# EAGLE board ASPIRATION-A (EAGLE 7.1.0)
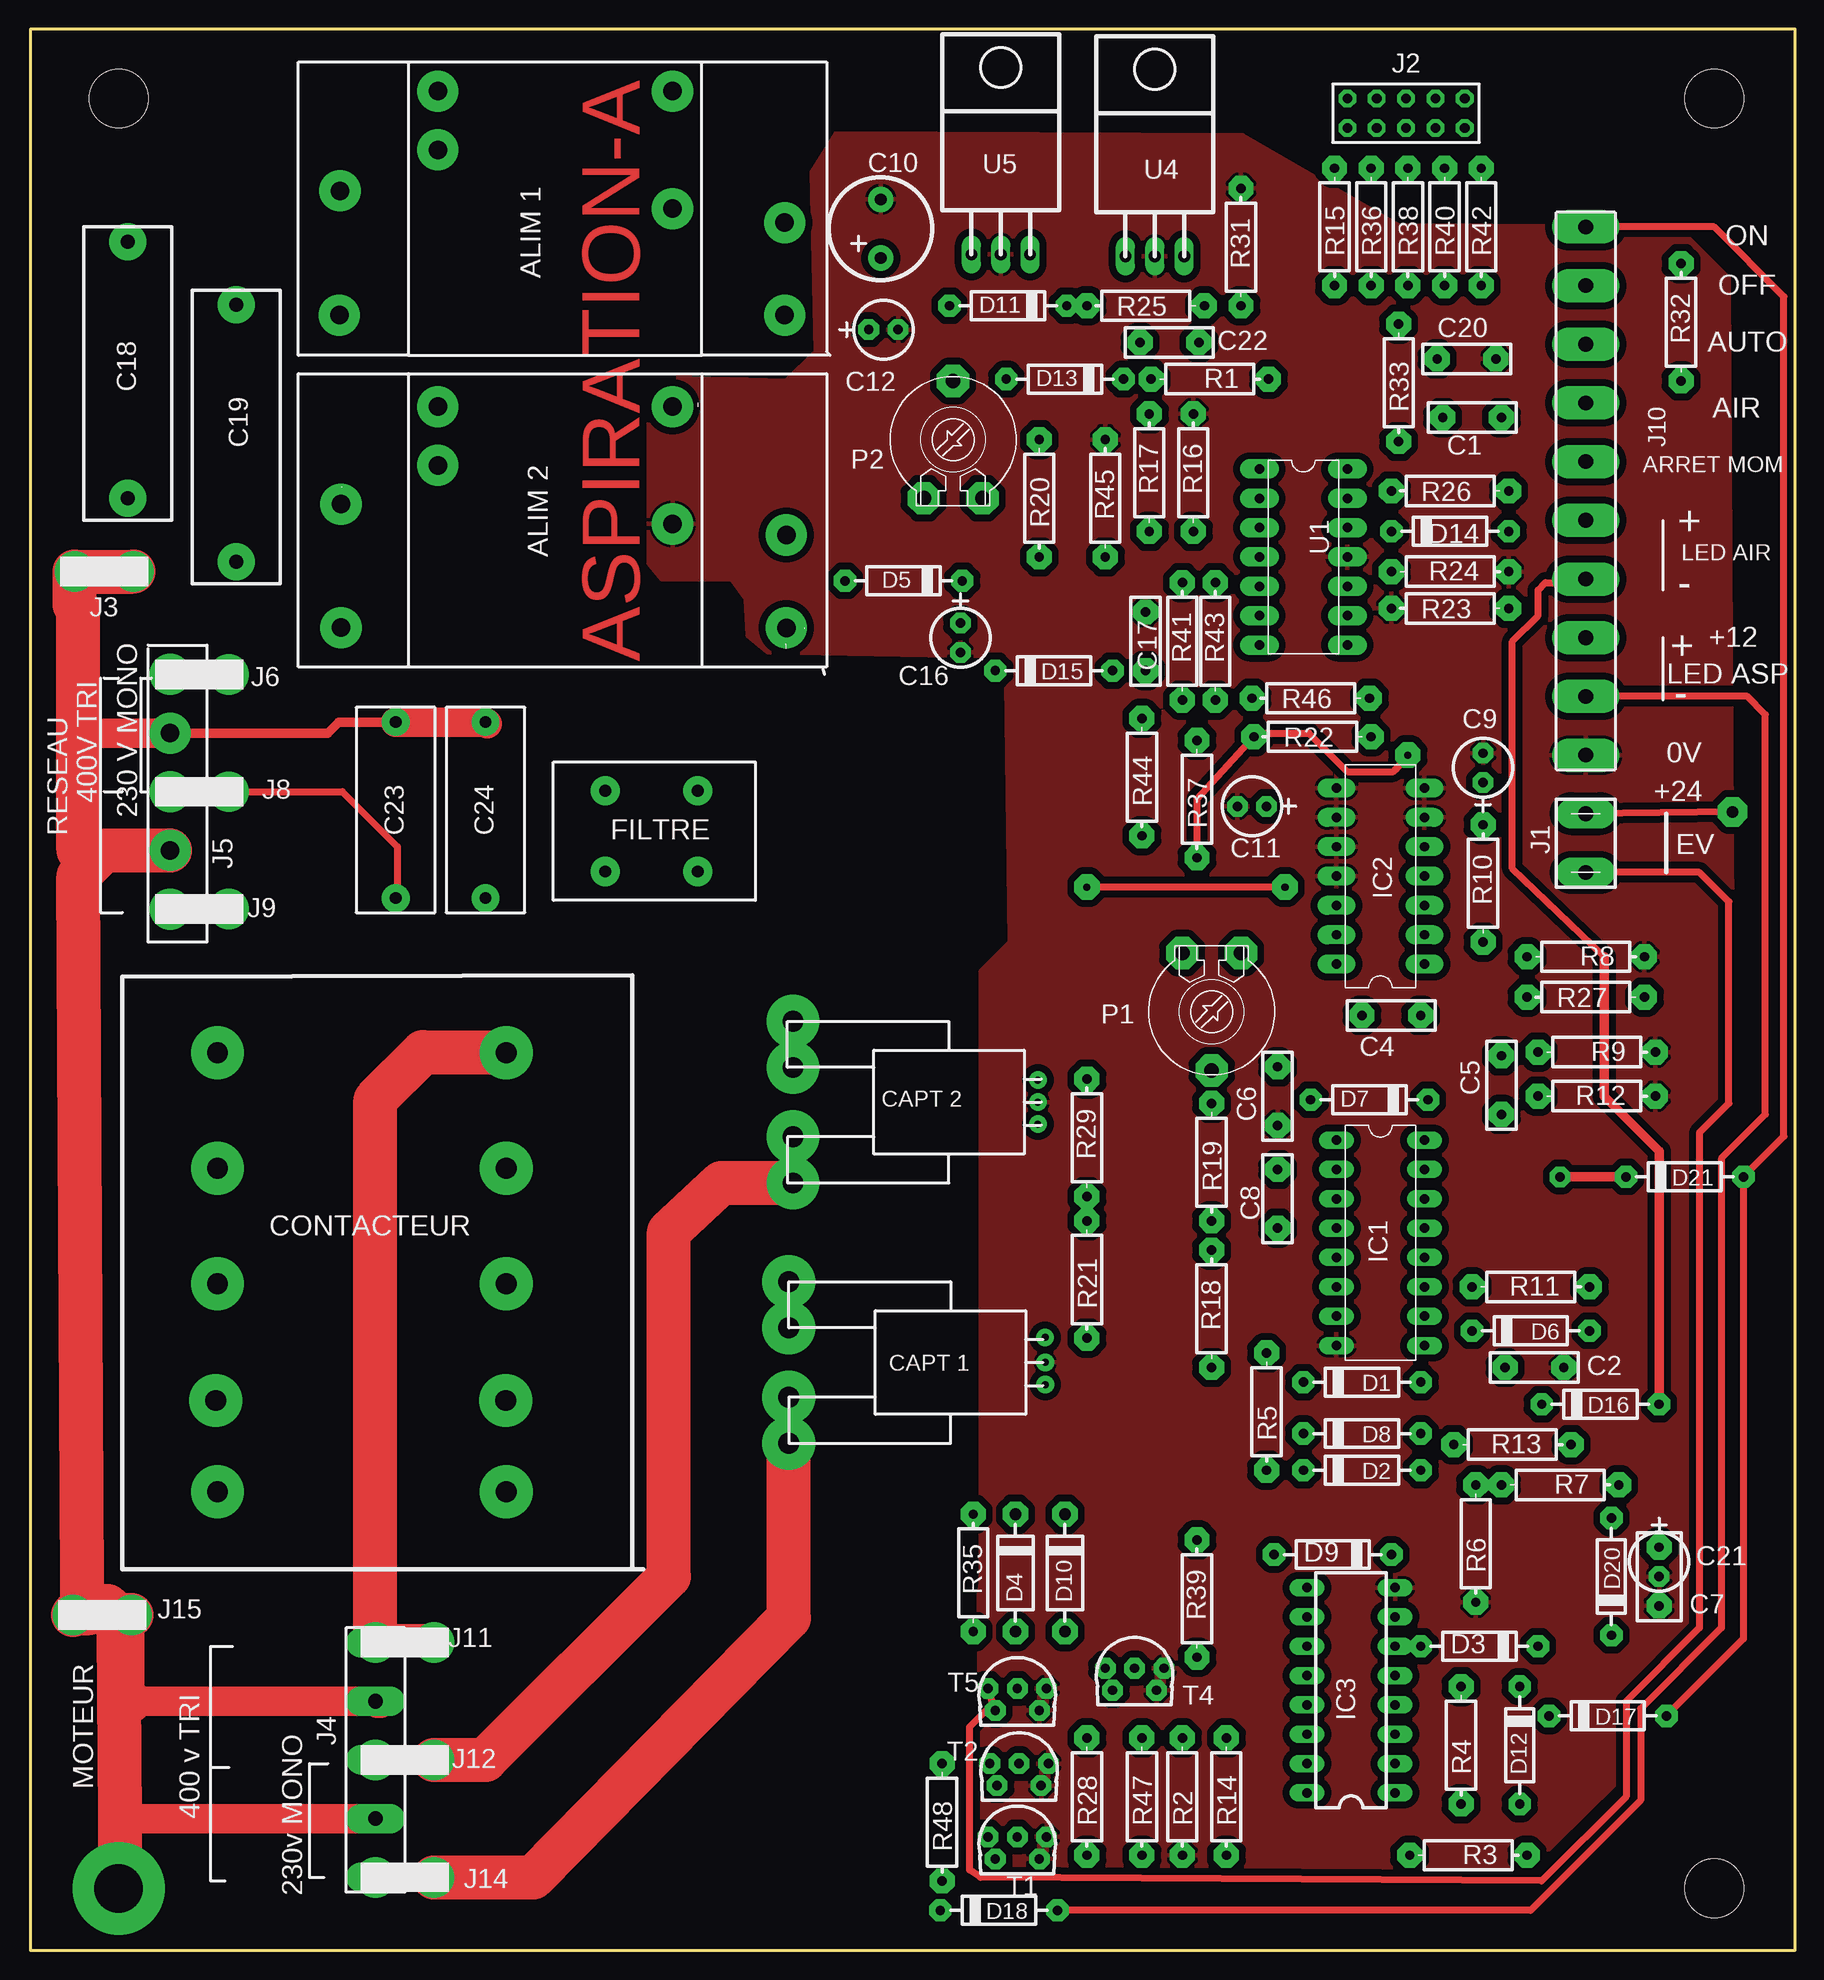
[diagram p0: board, top side]
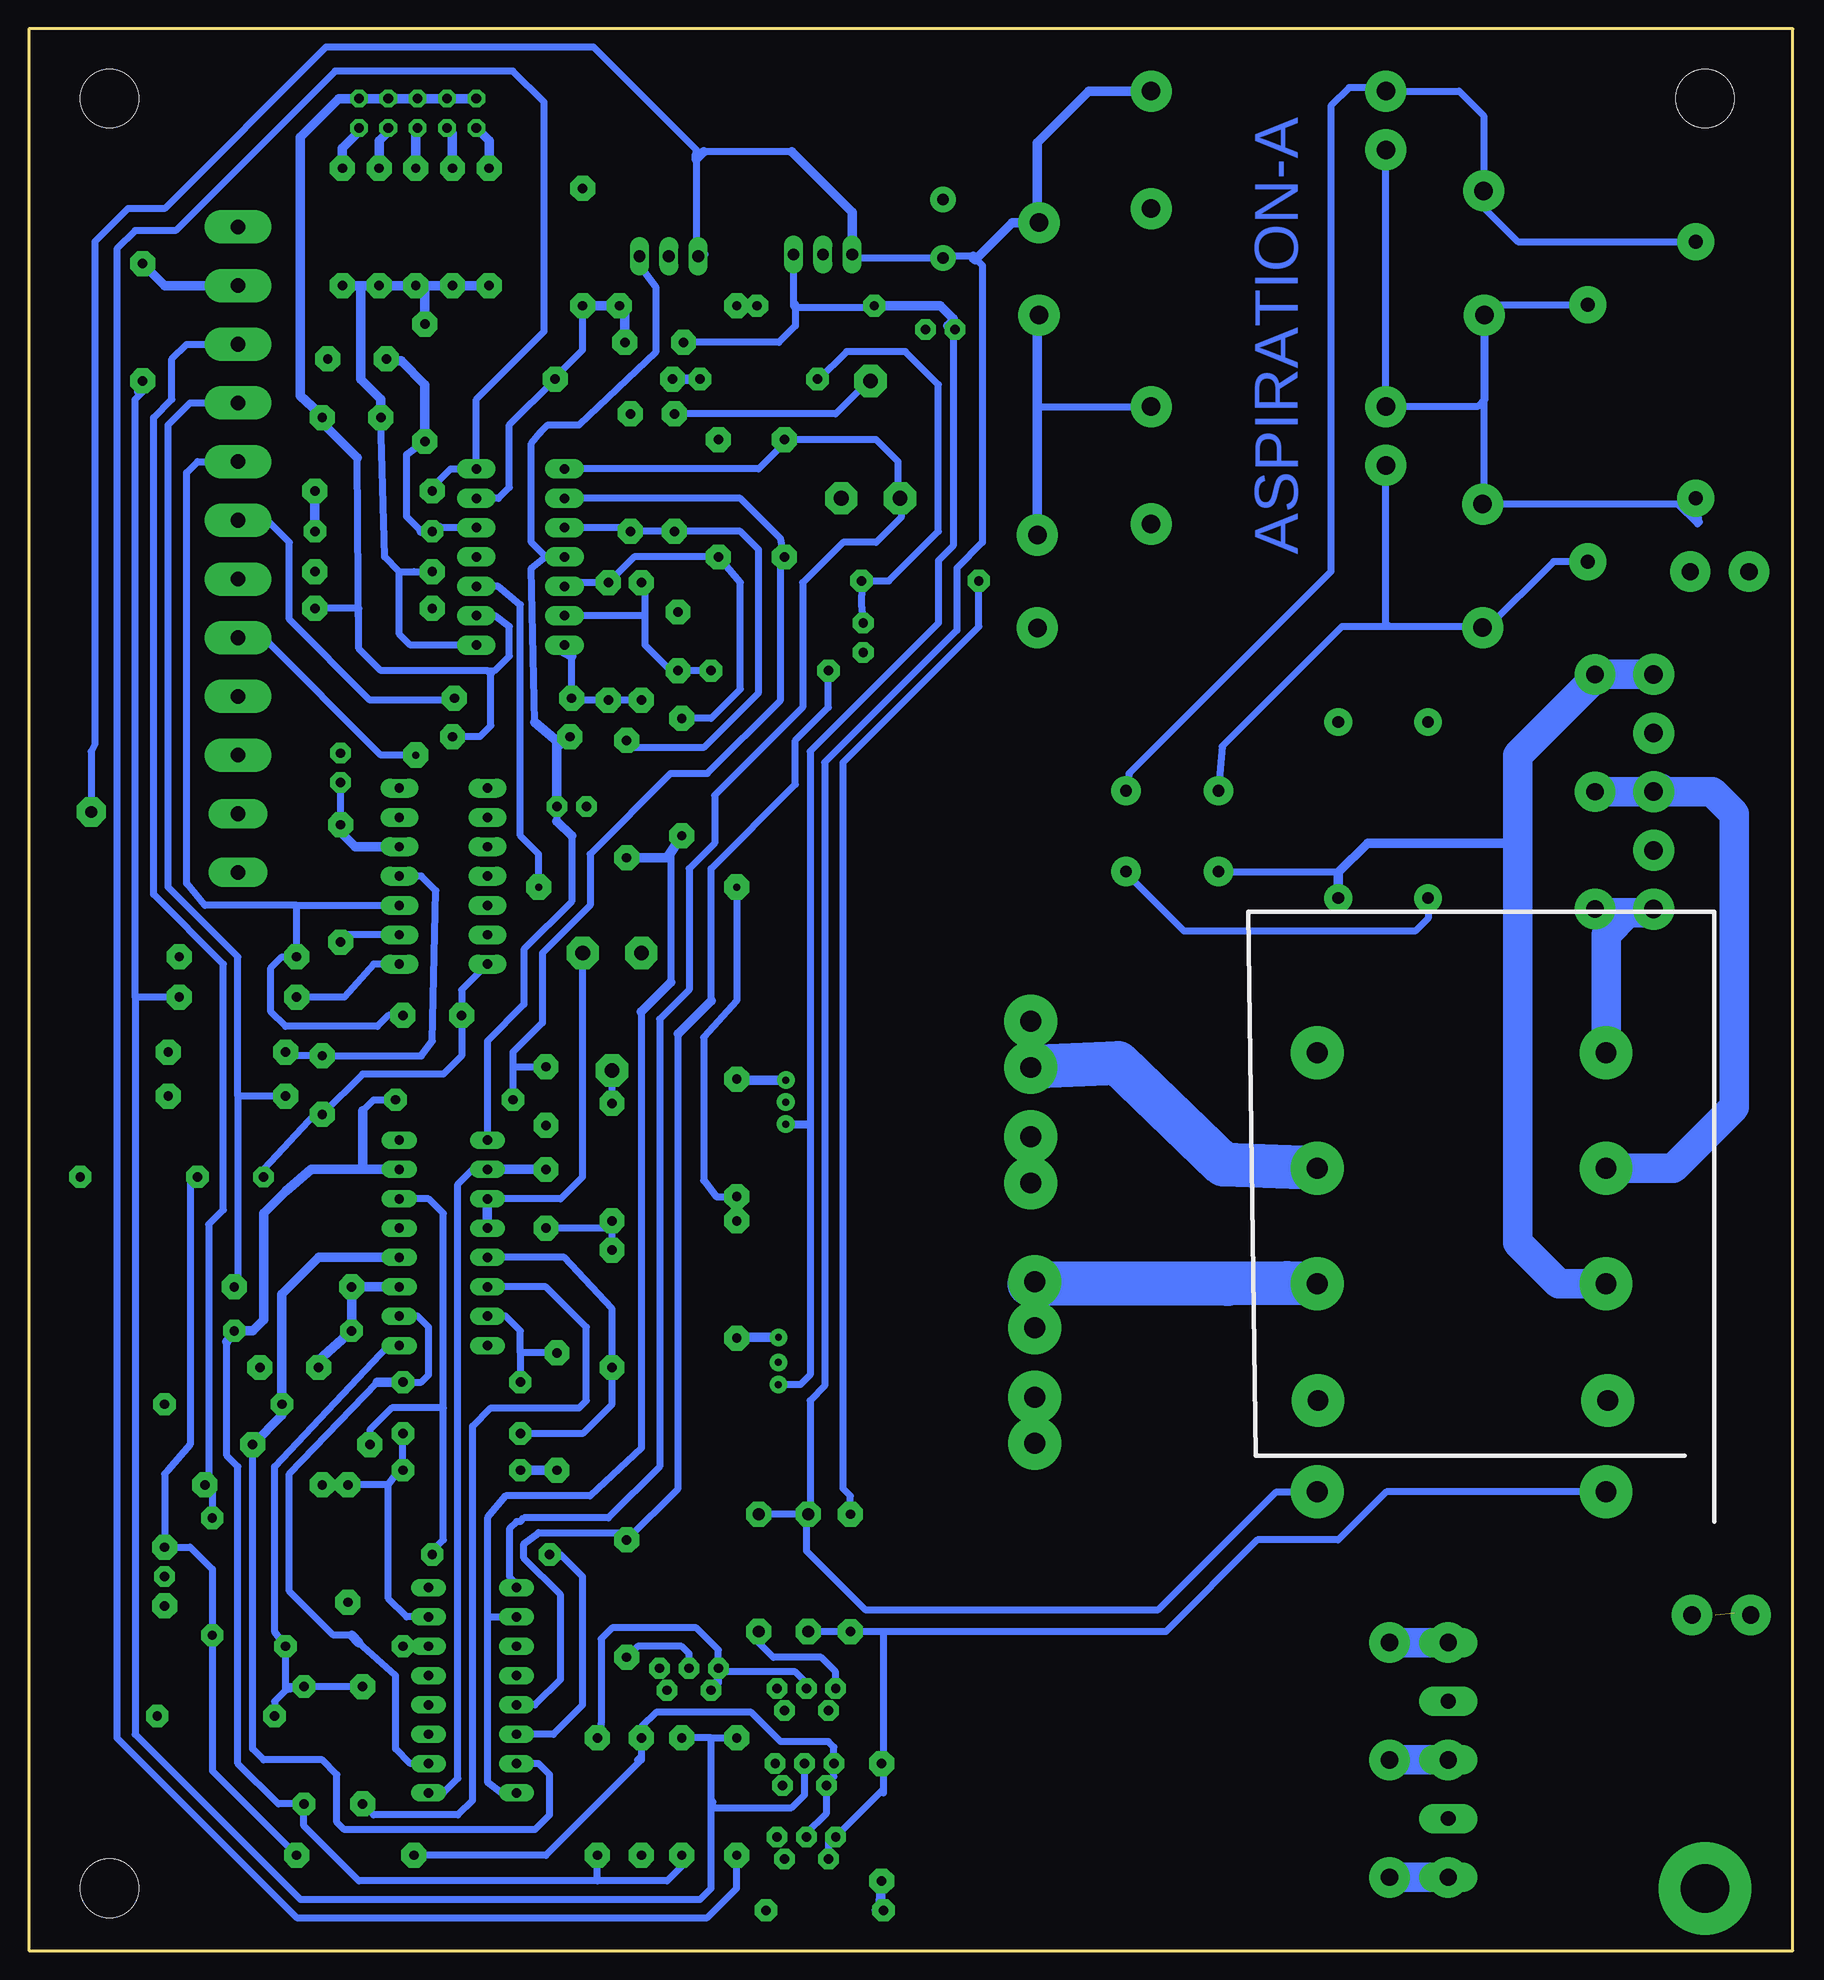
[diagram p1: board, bottom side, seen from below]

Size 152.72 x 166.37 mm. Coordinates in mm from the lower left corner, seen from the top.
Outline: 152.72,166.37 152.72,0 0,0 0,166.37 152.72,166.37
Copper layers (1*16): Top 0.035mm / dielectric 1.5mm / Bottom 0.035mm
Design rules "default": minimum track width 10mil, minimum drill 24mil, track to track 8mil, track to pad 8mil, pad to pad 8mil, via to via 8mil, smd to smd 8mil, copper to edge 40mil, drill to drill 8mil, minimum pad ring 10mil, minimum via ring 8mil, stop-mask expansion 0mil, vias tented up to drill 0mil, thermal gap 10mil
Holes 5.08 mm at 7.62,160.34 145.73,160.34 145.73,5.4

## Footprints (pad centres in the part's own frame; a part is rotated, then mirrored left to right if it is on the bottom)
C-5 = drill 0.813 pad 2.159 octagon: 1 5.08,0; 2 0,0
C-5L = drill 0.813 pad 2.159 octagon: 1 5.08,0; 2 0,0
02P000RA = drill 0.813 pad 1.778 octagon: N 2.54,0; P 0,0
02P010RA = drill 1.016 pad 2.184: N 5.08,0; P 0,0
C-22 = drill 1.2 pad 3.2: 1 2.54,0; 2 24.765,0
C-15 = drill 1.016 pad 2.413: 1 0,0; 2 15.24,0
D-10 = drill 0.813 pad 1.93 octagon: A -5.08,0; K 5.08,0
D-10_1MM = drill 1.016 pad 2.184 octagon: A -5.08,0; K 5.08,0
DIL-16 = drill 0.813 pad 1.524 long: 1 -8.89,-3.81; 2 -6.35,-3.81; 3 -3.81,-3.81; 4 -1.27,-3.81; 5 1.27,-3.81; 6 3.81,-3.81; 7 6.35,-3.81; 8 8.89,-3.81; 9 8.89,3.81; 10 6.35,3.81; 11 3.81,3.81; 12 1.27,3.81; 13 -1.27,3.81; 14 -3.81,3.81; 15 -6.35,3.81; 16 -8.89,3.81
DIL-14 = drill 0.813 pad 1.651 long: 1 -7.62,-3.81; 2 -5.08,-3.81; 3 -2.54,-3.81; 4 0,-3.81; 5 2.54,-3.81; 6 5.08,-3.81; 7 7.62,-3.81; 8 7.62,3.81; 9 5.08,3.81; 10 2.54,3.81; 11 0,3.81; 12 -2.54,3.81; 13 -5.08,3.81; 14 -7.62,3.81
DIL-16' = drill 0.813 pad 1.397 octagon: 1 -8.89,-3.81; 2 -6.35,-3.81; 3 -3.81,-3.81; 4 -1.27,-3.81; 5 1.27,-3.81; 6 3.81,-3.81; 7 6.35,-3.81; 8 8.89,-3.81; 9 8.89,3.81; 10 6.35,3.81; 11 3.81,3.81; 12 1.27,3.81; 13 -1.27,3.81; 14 -3.81,3.81; 15 -6.35,3.81; 16 -8.89,3.81
2X1_508 = drill 1.27 pad 2.54 long: 1 -1.27,0; 2 3.81,0
CON05X2 = drill 0.838 pad 1.524 octagon: 1 0,0; 2 0,2.54; 3 2.54,0; 4 2.54,2.54; 5 5.08,0; 6 5.08,2.54; 7 7.62,0; 8 7.62,2.54; 9 10.16,0; 10 10.16,2.54
2_TROUS = drill 1.5 pad 3.5: 1 0,0; 2 0,5.08
5X1_508 = drill 1.27 pad 2.54 long: 1 0,0; 2 5.08,0; 3 10.16,0; 4 15.24,0; 5 20.32,0
10X1_508 = drill 1.27 pad 2.921 long: 1 0,0; 2 5.08,0; 3 10.16,0; 4 15.24,0; 5 20.32,0; 6 25.4,0; 7 30.48,0; 8 35.56,0; 9 40.64,0; 10 45.72,0
PT-10 = drill 1.27 pad 2.794 octagon: 1 -2.54,-5.08; 2 2.54,-5.08; 3 0,5.08
PAST_4,2 = drill 4.2 pad 8: 1 0,0
R-10 = drill 0.813 pad 2.159 octagon: 1 -5.08,0; 2 5.08,0
TO92_L = drill 0.813 pad 1.778 octagon: 1 0,0; 2 1.905,1.905; 3 3.81,0; 4 -0.635,1.905; 5 4.445,1.905
DIL-14' = drill 0.813 pad 1.676 long: 1 -7.62,-3.81; 2 -5.08,-3.81; 3 -2.54,-3.81; 4 0,-3.81; 5 2.54,-3.81; 6 5.08,-3.81; 7 7.62,-3.81; 8 7.62,3.81; 9 5.08,3.81; 10 2.54,3.81; 11 0,3.81; 12 -2.54,3.81; 13 -5.08,3.81; 14 -7.62,3.81
DIL16 = drill 0.813 pad 1.524 long: 1 -8.89,-3.81; 2 -6.35,-3.81; 3 -3.81,-3.81; 4 -1.27,-3.81; 5 1.27,-3.81; 6 3.81,-3.81; 7 6.35,-3.81; 8 8.89,-3.81; 9 8.89,3.81; 10 6.35,3.81; 11 3.81,3.81; 12 1.27,3.81; 13 -1.27,3.81; 14 -3.81,3.81; 15 -6.35,3.81; 16 -8.89,3.81
TO220H = drill 1.016 pad 1.651 long: 1 0,0; 2 2.54,0; 3 5.08,0
PAST_1,8 = drill 1.8 pad 4.572: P$1 0,0
PAST_1,6 = drill 1.6 pad 3.556: 1 0,0
PAST_0,6 = drill 0.6 pad 1.524: 1 0,0
PAST_1,0 = drill 1.016 pad 2.54: 1 0,0

## Placement (x,y rotation side)
C1  0.1µF  [C-5]  122.24,132.72 0 top
C2  0.1µF  [C-5]  132.71,50.48 180 top
C4  0.1µF  [C-5]  120.33,80.96 180 top
C5  0.1µF  [C-5]  127.32,77.47 270 top
C6  1µF  [C-5]  107.95,71.44 90 top
C7  0.22µF  [C-5L]  140.97,29.85 90 top
C8  1µF  [C-5]  107.95,62.55 90 top
C9  4.7µF  [02P000RA]  125.73,101.12 90 top
C10  [02P010RA]  73.58,146.53 90 top
C11  22µF  [02P000RA]  107,99.06 180 top
C12  [02P000RA]  72.55,140.33 0 top
C16  [02P000RA]  80.49,114.94 270 top
C17  0.47µF  [C-5]  96.52,115.89 270 top
C18  [C-22]  8.41,150.5 270 top
C19  [C-22]  17.78,145.02 270 top
C20  0.1µF  [C-5]  126.84,137.79 180 top
C21  [02P000RA]  140.97,34.92 270 top
C22  0.22µF  [C-5]  101.12,139.22 180 top
C23  [C-15]  31.59,106.36 270 top
C24  [C-15]  39.37,106.36 270 top
D1  1N4148  [D-10]  115.25,49.21 180 top
D2  1N4148  [D-10]  115.25,41.59 180 top
D3  1N4148  [D-10]  125.41,26.35 0 top
D4  1N4004  [D-10_1MM]  85.25,32.7 90 top
D5  1N4148  [D-10]  75.56,118.59 0 top
D6  1N4148  [D-10]  129.86,53.66 180 top
D7  1N4148  [D-10]  115.89,73.66 0 top
D8  1N4148  [D-10]  115.25,44.77 180 top
D9  1N4148  [D-10]  112.71,34.29 0 top
D10  1N4004  [D-10_1MM]  89.54,32.7 90 top
D11  1N4148  [D-10]  84.61,142.4 0 top
D12  1N4148  [D-10]  128.9,17.78 90 top
D13  1N4148  [D-10]  89.54,136.05 0 top
D14  [D-10]  122.87,122.87 180 top
D15  1N4148  [D-10]  88.58,110.81 180 top
D16  1N4148  [D-10]  135.89,47.31 180 top
D17  1N4148  [D-10]  136.52,20.32 180 top
D18  1N4148  [D-10]  83.82,3.49 180 top
D20  1N4148  [D-10]  136.84,32.39 270 top
D21  1N4148  [D-10]  143.19,66.99 180 top
IC1  4049  [DIL-16]  116.84,61.28 270 top
IC2  4013  [DIL-14]  116.84,93.03 90 top
IC3  4520  [DIL-16']  114.3,22.54 90 top
J1  [2X1_508]  134.62,97.16 270 top
J2  CON05X2  [CON05X2]  113.98,157.8 0 top
J3  [2_TROUS]  8.89,119.38 90 top
J4  [5X1_508]  29.84,26.67 270 top
J6  [2_TROUS]  17.14,110.49 90 top
J8  [2_TROUS]  12.06,100.33 270 top
J9  [2_TROUS]  17.14,90.17 90 top
J10  EXPL10-2  [10X1_508]  134.62,149.22 270 top
J11  [2_TROUS]  34.92,26.67 90 top
J12  [2_TROUS]  34.92,16.51 90 top
J14  [2_TROUS]  29.84,6.35 270 top
J15  [2_TROUS]  3.65,29.05 270 top
P1  1M  [PT-10]  102.23,81.28 180 top
P2  100K  [PT-10]  79.85,130.81 0 top
PAS1  [PAST_4,2]  7.62,5.4 0 top
R1  15K  [R-10]  102.08,136.05 180 top
R2  22K  [R-10]  99.7,13.34 90 top
R3  10K  [R-10]  124.46,8.25 180 top
R4  22K  [R-10]  123.83,17.78 90 top
R5  22K  [R-10]  107,46.67 90 top
R6  100K  [R-10]  125.1,35.24 90 top
R7  10K  [R-10]  132.4,40.32 180 top
R8  220K  [R-10]  134.62,86.04 180 top
R9  220K  [R-10]  135.57,77.79 180 top
R10  220K  [R-10]  125.73,92.39 270 top
R11  22K  [R-10]  129.86,57.47 180 top
R12  47K  [R-10]  135.57,73.98 180 top
R13  22K  [R-10]  128.27,43.81 180 top
R14  22K  [R-10]  103.51,13.34 90 top
R15  100K  [R-10]  112.87,149.22 90 top
R16  47K  [R-10]  100.65,127.95 270 top
R17  10K  [R-10]  96.84,127.95 270 top
R18  1.5M  [R-10]  102.23,55.56 270 top
R19  1.5M  [R-10]  102.23,68.26 90 top
R20  2.2M  [R-10]  87.31,125.73 90 top
R21  22K  [R-10]  91.44,58.1 90 top
R22  100K  [R-10]  110.97,105.09 0 top
R23  10K  [R-10]  122.87,116.2 0 top
R24  22K  [R-10]  122.87,119.38 180 top
R25  47K  [R-10]  96.52,142.4 0 top
R26  10K  [R-10]  122.87,126.36 0 top
R27  22K  [R-10]  134.62,82.55 0 top
R28  22K  [R-10]  91.44,13.34 90 top
R29  22K  [R-10]  91.43,70.37 270 top
R31  15K  [R-10]  104.77,147.48 270 top
R32  22K  [R-10]  142.88,140.97 270 top
R33  22K  [R-10]  118.43,135.73 90 top
R35  100  [R-10]  81.6,32.7 270 top
R36  [R-10]  116.05,149.22 90 top
R37  47K  [R-10]  100.96,99.7 90 top
R38  [R-10]  119.22,149.22 90 top
R39  22K  [R-10]  100.96,30.48 270 top
R40  [R-10]  122.4,149.22 90 top
R41  1M  [R-10]  99.7,113.35 270 top
R42  [R-10]  125.57,149.22 90 top
R43  10K  [R-10]  102.55,113.35 270 top
R44  47K  [R-10]  96.2,101.6 90 top
R45  47K  [R-10]  93.03,125.73 270 top
R46  4.7K  [R-10]  110.81,108.43 0 top
R47  22K  [R-10]  96.2,13.34 90 top
R48  4.7K  [R-10]  78.9,11.11 90 top
T1  [TO92_L]  83.5,7.94 0 top
T2  [TO92_L]  83.66,14.29 0 top
T4  [TO92_L]  93.66,22.54 0 top
T5  [TO92_L]  83.5,20.8 0 top
U1  LM324  [DIL-14']  110.17,120.65 270 top
U2  [DIL16]  114.3,22.54 90 top
U4  [TO220H]  94.77,146.69 0 top
U5  [TO220H]  81.44,146.84 0 top
U$11  [PAST_1,8]  16.18,57.73 0 top
U$12  [PAST_1,8]  16.18,77.73 0 top
U$14  [PAST_1,8]  16.18,67.73 0 top
U$20  [PAST_1,8]  41.18,67.73 0 top
U$21  [PAST_1,8]  41.18,77.73 0 top
U$22  [PAST_1,8]  41.18,57.73 0 top
U$23  [PAST_1,8]  41.18,39.72 0 top
U$24  [PAST_1,8]  16.18,39.72 0 top
U$26  [PAST_1,8]  66,76.46 0 top
U$28  [PAST_1,8]  66,70.46 0 top
U$29  [PAST_1,6]  26.77,152.34 0 top
U$30  [PAST_1,8]  66,80.46 0 top
U$31  [PAST_1,8]  66,66.46 0 top
U$32  [PAST_1,6]  26.72,141.59 0 top
U$33  [PAST_1,6]  65.27,149.59 0 top
U$34  [PAST_1,6]  65.27,141.59 0 top
U$35  [PAST_1,6]  26.86,125.23 0 top
U$36  [PAST_1,8]  65.63,57.92 0 top
U$37  [PAST_1,8]  41.11,47.62 0 top
U$39  [PAST_1,6]  26.86,114.54 0 top
U$40  PAST_0,6"  [PAST_0,6]  87.2,71.55 0 top
U$41  PAST_0,6"  [PAST_0,6]  87.2,73.46 0 top
U$57  [PAST_1,6]  65.41,122.55 0 top
U$58  [PAST_1,8]  65.63,53.92 0 top
U$60  [PAST_1,8]  65.63,47.92 0 top
U$61  [PAST_1,8]  65.63,43.92 0 top
U$62  [PAST_1,8]  16.03,47.62 0 top
U$66  [PAST_1,6]  65.41,114.51 0 top
U$72  [PAST_1,6]  35.24,160.97 0 top
U$73  [PAST_1,6]  55.56,160.97 0 top
U$74  [PAST_1,6]  35.24,155.89 0 top
U$75  [PAST_1,6]  55.56,150.81 0 top
U$76  [PAST_1,6]  35.24,133.67 0 top
U$77  [PAST_1,6]  35.24,128.59 0 top
U$78  [PAST_1,6]  55.56,123.51 0 top
U$79  [PAST_1,6]  55.56,133.67 0 top
U$80  [PAST_1,6]  12.06,100.33 0 top
U$81  [PAST_1,6]  12.06,90.17 0 top
U$82  [PAST_1,6]  12.06,110.49 0 top
U$83  [PAST_1,6]  12.06,105.41 0 top
U$84  [PAST_1,6]  12.06,95.25 0 top
U$89  [PAST_1,0]  57.74,93.42 0 top
U$90  [PAST_1,0]  49.74,93.42 0 top
U$91  PAST_0,6"  [PAST_0,6]  87.18,75.36 0 top
U$92  PAST_0,6"  [PAST_0,6]  87.82,53.09 0 top
U$93  [PAST_1,0]  49.74,100.42 0 top
U$94  PAST_0,6"  [PAST_0,6]  87.83,49.01 0 top
U$95  PAST_0,6"  [PAST_0,6]  87.83,50.92 0 top
U$97  [PAST_1,0]  57.74,100.42 0 top

## Library data of the parts
C1 C2 C4-C12 C16-C24 D1-D18 D20 D21 P1 P2 R1-R29 R31-R33 R35-R48 = passif
IC1 IC2 = 40xx
IC3 = 45xx
J1-J4 J6 J8 J9 J11 J12 J14 J15 = CONNECT1
J10 = connect
PAS1 U$11 U$12 U$14 U$20-U$24 U$26 U$28-U$37 U$39-U$41 U$57 U$58 U$60-U$62 U$66 U$72-U$84 U$89-U$95 U$97 = PAST
T1 T2 T4 T5 = TRANS1
U1 = linear
U2 = THOMSON
U4 U5 = regulate

## Nets
+5V: C12.P C22.1 D11.A U5.3 U$40.1 U$94.1
+12V: C11.P IC1.1 IC3.10 IC3.16 J10.8 R22.1 R37.1 R44.1 U1.4 U4.3
+24V: C10.P D4.K D10.K J1.1 U4.1 U5.1 U$23.P$1 U$33.1 U$73.1
AIRµ: J10.4 R11.1 R12.2
ARRET.MOM: C4.2 IC2.3 J10.5 R8.2
CDE-AUTO: D20.A J10.3 R7.1
CONTACTEUR: D4.A R35.2 R48.2 T1.1 T1.4 U$24.P$1
EV: D10.A J1.2 T5.1 T5.4
GND: C2.2 C6.2 C7.2 C9.N C10.N C11.N C12.N C16.N C17.2 C20.2 C21.N IC1.8 IC2.6 IC2.7 IC2.8 IC2.9 IC2.10 IC2.11 IC3.8 J10.10 R2.1 R6.1 R8.1 R9.1 R12.1 R16.1 R23.1 R24.1 R31.1 R45.1 T1.3 T1.5 T2.3 T2.5 T4.3 T4.5 T5.3 T5.5 U1.11 U2.8 U4.2 U5.2 U$41.1 U$78.1 U$95.1
GNDA: C23.1 C24.1 J3.1 J3.2 J4.2 J4.4 J15.1 J15.2 PAS1.1 U$83.1 U$84.1
N$1: R29.1 U$91.1
N$2: U$22.P$1 U$36.P$1 U$58.P$1
N$3: C20.1 D14.K R33.1 U1.12
N$4: C4.1 C5.1 C7.1 C21.P D20.K D21.K IC2.14 R3.1
N$5: D13.K R1.2
N$6: D1.K IC1.7 R5.2
N$7: D2.K R5.1
N$8: D8.K IC1.5 R18.2
N$9: IC1.3 IC1.4 P1.1
N$10: C8.1 IC1.2 IC3.1
N$11: D1.A IC1.10 IC3.2
N$12: D3.A IC3.6
N$13: C2.1 D6.K IC1.11 R11.2
N$15: J4.5 J14.1 J14.2 U$60.P$1 U$61.P$1
N$16: C5.2 IC2.4 R9.2
N$17: R21.1 U$92.1
N$18: D3.K D12.K D17.K IC1.9 R4.2
N$19: D16.K IC1.12 IC3.15 R13.1
N$20: C9.P IC2.5 R10.1
N$21: IC2.2 R10.2
N$23: P1.3 R19.2
N$24: D6.A D7.K D12.A IC1.15 R14.1 R47.1
N$25: C8.2 R18.1 R19.1
N$26: J9.1 J9.2 U$12.P$1 U$81.1
N$27: U$20.P$1 U$26.P$1 U$30.P$1
N$28: P2.3 R17.1
N$29: C6.1 D7.A R20.1 U1.2
N$30: IC3.9 P2.1 R20.2 U1.1
N$31: R14.2 T4.1 T4.4 T5.2
N$32: D9.A IC3.14
N$33: C1.1 J2.2 J2.4 J2.6 J2.8 J2.10 R22.2 R23.2 U1.9
N$34: R16.2 R17.2 R37.2 U1.3
N$35: C23.2 J8.1 J8.2 U$14.P$1 U$80.1 U$89.1
N$36: R21.2 R29.2 U1.10
N$37: C24.2 J6.1 J6.2 U$11.P$1 U$82.1 U$90.1
N$38: J4.3 J12.1 J12.2 U$28.P$1 U$31.P$1
N$39: C18.2 C19.1 U$32.1 U$35.1 U$74.1 U$76.1
N$41: U$34.1 U$57.1 U$79.1
N$45: J4.1 J11.1 J11.2 U$21.P$1
N$47: C22.2 R1.1 R25.2 R31.2 U1.13
N$48: R41.2 R43.2 R46.1 U1.7
N$50: J2.3 R36.2
N$51: IC2.1 R27.1
N$52: C1.2 R15.1 R24.2 R33.2 R36.1 R38.1 R40.1 R42.1 U1.8
N$53: IC1.6 R4.1
N$54: D5.A R35.1
N$56: D11.K R25.1
N$57: J2.9 R42.2
N$58: R26.1 R28.1 U1.14
N$59: D14.A R26.2
N$60: R27.2 R28.2 R32.2 R47.2 T2.2
N$61: C19.2 U$77.1 U$93.1
N$62: D15.K IC3.13 R39.1
N$63: C16.P D5.K D13.A
N$64: J2.5 R38.2
N$65: R39.2 T4.2
N$66: J2.7 R40.2
N$67: J2.1 R15.2
N$68: C17.1 D15.A R41.1 U1.6
N$69: R43.1 R44.2 R45.2 U1.5
N$70: D16.A J10.7
N$71: J10.6 R46.2
N$72: D18.A J10.9
N$73: D18.K R48.1
N$75: D2.A D8.A IC3.7 R6.2 R7.2
N$76: D9.K IC1.14 R13.2
N$77: C18.1 U$29.1 U$72.1 U$97.1
N$200: R2.2 R3.2 T1.2 T2.1 T2.4
OFF: J10.2 R32.1
ON: D17.A D21.A J10.1
VDD: U2.15
VSS: U2.12

## Tracks (layer width: path | path; a pad name or v marks a point on that pad's centre or on a via)
+5V
  Bottom 0.61: U$94.1 85.93,49.01 85.09,49.85 85.09,71.44 | 85.09,71.44 87.31,71.44 U$40.1 85.3,71.55 85.09,71.44 | 85.09,71.44 85.09,103.82 73.98,114.93 73.98,120.33 72.71,121.6 72.71,140.33 72.55,140.18 72.55,140.02 | 86.52,142.4 U5.3 | 86.52,142.4 86.36,142.24 79.38,142.24 D11.A | D11.A | C22.1 87.79,139.22 86.36,140.65 86.36,142.56 86.52,142.4 | 86.52,142.4
  Bottom 0.813: 73.18,140.65 72.55,140.02 | C12.P 73.18,140.65 | 73.18,140.65 72.87,140.97 | D11.A 73.82,142.4 72.71,141.29 72.71,140.65 | 72.71,140.65 | 73.18,140.65 72.71,140.65
+12V  (via drill 0.61 pad 2.18)
  Top 0.61: R37.1 100.96,99.7 R22.1 | v119.22,103.51 118.11,102.23 117.95,102.08 113.98,102.08 110.65,105.41 106.2,105.41
  Top 0.813: R22.1 106.2,105.41
  Bottom 0.61: 113.03,28.89 113.03,37.46 111.44,39.37 104.14,39.37 99.7,43.5 99.7,81.28 | R44.1 95.89,96.2 | 97.15,83.82 97.15,94.93 97.47,94.62 100.33,94.62 100.65,94.3 R37.1 100.96,94.3 100.65,94.62 | 106.05,120.65 U1.4 107.95,120.65 | 107.95,120.65 109.22,121.92 109.22,130.49 108.43,131.45 107.79,132.08 105.09,132.08 98.42,138.43 98.42,143.99 99.85,145.89 | 107.95,120.65 109.22,119.7 108.9,106.36 | IC3.16 111.76,13.65 113.03,14.6 113.03,28.89 | 105.73,96.52 105.73,90.81 109.86,86.68 109.86,81.92 113.03,78.74 IC1.1 | C11.P 107,97.79 | 106.68,104.46 107,104.46 | 113.03,28.89 IC3.10 | v119.22,103.51 122.24,103.51 132.4,113.67 J10.8
  Bottom 0.813: 97.15,83.82 99.7,81.28 | R44.1 97.47,94.62 100.65,94.62 | R22.1 106.68,104.46 108.9,106.36 | 107,97.79 105.73,96.52 | 107,104.46 C11.P | U4.3 100.01,146.84 100.17,146.21 99.85,145.89
+24V  (via drill 1.02 pad 2.54)
  Top 0.61: v147.32,98.58 147.48,98.58 J1.1
  Bottom 0.61: 86.68,155.73 94.3,155.73 | 94.93,155.1 94.93,147.48 | C10.P 73.66,146.61 73.66,146.69 70.96,146.69 70.17,145.89 70.17,121.92 72.39,119.7 72.39,114.3 83.82,102.87 83.82,48.89 85.09,47.63 85.09,37.78 | U5.1 81.6,146.68 81.6,146.53 73.66,146.53 | C10.P 73.66,146.53 | C10.P | 73.66,146.53 | v147.32,98.58 147.32,103.82 147,104.46 147,147.95 144.14,150.81 140.97,150.81 127,164.78 103.82,164.78 94.93,155.89 94.93,155.42 | U$23.P$1 44.73,39.72 54.93,29.53 80.33,29.53 85.41,34.61 85.41,37.46 85.09,37.78 | 85.09,37.78 D4.K D10.K
  Bottom 0.813: U5.1 81.44,150.49 86.68,155.73 | 94.3,155.73 94.93,155.1 94.93,155.42 | U4.1 94.46,146.69 94.3,146.84 94.93,147.48 | U$73.1 60.96,160.97 65.41,156.53 65.41,150.18 65.09,149.86 65.27,149.67 U$33.1 67.58,149.59 70.8,146.37 70.96,146.53 70.96,146.69
AIRµ
  Bottom 0.61: J10.4 138.75,133.98 140.65,132.08 140.65,92.07 134.62,86.04 134.62,73.98 | R11.1 134.62,57.79 134.62,73.98 | R12.2 134.62,73.98
ARRET.MOM
  Bottom 0.61: C4.2 121.6,80.96 122.55,80.01 130.49,80.01 131.76,81.28 131.76,85.09 130.81,86.04 R8.2 129.54,90.49 | J10.5 138.11,128.91 139.07,127.95 139.07,92.39 137.48,90.49 129.54,90.49 | 129.54,90.49 IC2.3
CDE-AUTO
  Bottom 0.61: J10.3 139.07,139.07 140.33,137.79 140.33,134.3 141.92,132.72 141.92,91.44 135.89,85.41 135.89,64.14 137.16,62.87 137.16,41.28 R7.1 136.84,39.69 D20.A
CONTACTEUR
  Bottom 0.61: U$24.P$1 35.2,39.72 39.37,35.56 46.36,35.56 54.29,27.62 78.74,27.62 | 78.74,27.62 R35.2 D4.A | 78.74,27.62 78.74,16.19 | 78.74,13.97 T1.4 83.18,9.84 83.5,9.53 T1.1 | 78.74,16.19 R48.2 | 78.74,13.97 78.74,13.65 | 78.74,16.19 78.74,13.97
EV
  Top 0.61: T5.4 T5.1 82.87,20.96 81.28,19.37 81.28,6.98 82.23,6.35 130.81,6.03 138.11,13.34 138.11,21.59 144.46,27.94 144.46,70.8 147,73.34 147,90.81 144.46,93.34 J1.2
  Bottom 0.61: T5.4 82.87,24.13 84.14,25.4 88.27,25.4 89.54,26.67 D10.A
GND
  pour Top (isolate 0.6): 147,144.78 147.64,24.76 126.68,4.13 83.66,4.13 82.39,5.24 82.23,7.46 82.07,30.8 82.23,31.75 82.23,84.77 84.77,87.31 84.45,109.86 82.23,112.08 63.82,112.4 62.07,113.82 61.91,117 60.64,118.75 54.61,118.75 53.02,120.65 53.02,135.25 53.97,136.21 65.41,135.89 67.94,138.43 67.63,153.99 69.69,157.32 104.93,157.16 118.43,149.38 142.56,149.22
GNDA  (1 unrouted)
  Top 0.61: 7.3,28.57 7.62,28.89
  Top 0.813: C23.1 31.59,106.2 31.43,106.04 31.11,106.36 26.67,106.36 25.72,105.41 U$83.1
  Top 2.54: 30.32,21.43 30,21.43 J4.2 8.57,21.59 | C23.1 | C24.1 | C24.1 | C23.1 C24.1 | C24.1 39.53,106.2 | U$84.1 4.13,95.25 | 4.45,105.41 U$83.1 | J4.4 7.62,11.43 7.62,11.11 7.78,10.95 7.78,6.19
  Top 3.81: U$84.1 6.35,95.25 4.13,93.03 4.45,31.75 4.45,29.21 4.13,29.21 | 4.13,29.21 5.08,29.21 | J15.1 3.81,29.21 4.13,29.21 | J15.1 | 7.62,28.89 6.67,29.85 6.67,29.05 7.78,29.05 J15.2 7.62,29.05 7.62,27.62 | 7.62,27.62 7.78,6.19 PAS1.1 | 8.57,21.59 7.94,22.23 7.94,28.26 7.62,27.62 | 7.62,27.62 7.3,28.57 | 4.13,95.25 4.13,105.73 | 4.13,105.73 4.45,105.41 | J3.1 J3.2 3.81,116.52 4.13,116.2 4.13,105.73
N$1
  Bottom 0.61: 91.43,74.93 91.44,74.93 | 91.43,74.93 R29.1 | 91.01,75.36 91.43,74.93
  Bottom 0.813: U$91.1 91.01,75.36
N$2
  Bottom 0.813: U$58.P$1 65.67,53.92 66.04,54.29 66.04,58.1
  Bottom 2.54: U$36.P$1 65.86,57.92 66.04,58.1 66.1,57.73
  Bottom 3.81: U$22.P$1 43.81,57.79 48.95,57.73 66.1,57.73
N$3
  Bottom 0.61: R33.1 120.02,129.54 120.02,124.14 118.74,122.87 | U1.12 117.16,123.19
  Bottom 0.813: 117.16,123.19 117.48,122.87 D14.K 118.74,122.87 | R33.1 118.43,135.57 120.49,137.64 121.6,137.64 C20.1 | C20.1
N$4  (via drill 0.81 pad 1.78)
  Top 0.813: v132.4,66.99 D21.K
  Bottom 0.61: IC2.14 115.25,83.18 C4.1 115.25,77.47 116.84,75.88 123.83,75.88 C5.1 127.95,72.39 132.4,67.63 132.71,66.99 v132.4,66.99 | D21.K 138.75,66.99 138.75,43.82 140.65,41.59 140.97,41.28 C21.P 138.75,34.93 136.84,33.02 D20.K 136.84,15.56 R3.1
N$5
  Bottom 0.813: D13.K R1.2
N$6
  Bottom 0.61: R5.2 110.17,51.75 | 110.17,51.75 D1.K | 110.17,51.75 110.17,53.66 111.44,54.93 IC1.7
N$7
  Bottom 0.813: R5.1 D2.K
N$8
  Bottom 0.61: IC1.5 106.36,60.01 102.23,55.56 R18.2 | D8.K 104.77,44.77 102.23,47.31 R18.2 | R18.2 101.6,50.17
N$9
  Bottom 0.61: IC1.3 106.68,65.09 104.77,66.99 P1.1
  Bottom 0.813: IC1.3 IC1.4
N$10
  Bottom 0.61: IC1.2 114.3,67.63 115.57,66.36 115.57,14.92 116.84,13.65 IC3.1
  Bottom 0.813: IC1.2 C8.1
N$11
  Bottom 0.61: IC1.10 119.06,54.93 118.11,53.97 118.11,49.85 118.74,49.21 D1.A | 122.55,49.21 130.17,41.28 130.17,31.11 126.36,27.31 124.78,27.31 | IC3.2 119.7,16.19 120.97,17.46 120.97,23.81 124.14,26.67
  Bottom 0.813: 122.55,49.21 D1.A | 124.14,26.67 124.78,27.31
N$12
  Bottom 0.813: IC3.6 D3.A
N$13
  Bottom 0.61: 127.64,51.12 C2.1
  Bottom 0.813: IC1.11 R11.2 D6.K 127.64,51.12
N$15
  Top 0.813: 65.43,47.92 65.41,47.94 | 65.43,47.92 U$60.P$1 | U$61.P$1 65.63,47.72 65.43,47.92
  Top 3.81: U$61.P$1 65.63,28.8 43.5,6.35 J14.2
  Bottom 2.54: J14.1 J14.2
N$16
  Bottom 0.61: IC2.4 118.74,93.03 117.48,91.76 117.79,78.74 118.74,77.47 C5.2 130.17,77.47 R9.2
N$17
  Bottom 0.61: R21.1 91.34,53.44 90.74,53.09 90.8,53.02
  Bottom 0.813: U$92.1 90.74,53.09
N$18
  Bottom 0.61: R4.2 D12.K | D12.K 130.49,22.54 D3.K 131.45,27.62 131.45,41.91 121.6,52.39 IC1.9 | D17.K 131.45,21.59 130.17,22.86 D12.K
N$19
  Bottom 0.61: IC3.15 108.58,16.19 107.63,15.24 107.63,11.75 108.9,10.48 125.41,10.48 126.05,11.11 126.05,15.24 127.32,16.51 132.4,16.51 133.35,17.46 R13.1
  Bottom 0.813: IC1.12 127.64,60.01 130.81,56.83 D16.K 130.81,46.35 R13.1 133.35,43.5
N$20
  Bottom 0.61: R10.1 C9.P
  Bottom 0.813: IC2.5 124.46,95.57 125.73,96.84 R10.1
N$21
  Bottom 0.61: IC2.2 125.1,87.95 R10.2
N$23
  Bottom 0.61: R19.2 P1.3
N$24
  Bottom 0.61: D7.K 122.87,73.66 123.83,72.71 | 135.57,52.71 135.57,42.86 134.62,41.91 134.62,16.19 131.13,12.7 D12.A 128.9,10.8 124.14,6.03 103.51,6.03 | 103.51,6.03 97.47,6.03 96.2,7.3 R47.1 | 103.51,6.03 R14.1
  Bottom 0.813: 123.83,67.63 128.27,67.63 130.49,65.72 132.4,63.82 132.4,54.61 133.35,53.66 D6.A 135.57,52.71 | 123.83,67.63 IC1.15 | 123.83,67.63 123.83,72.71
N$25
  Bottom 0.61: C8.2 102.55,62.55 102.23,62.23 102.23,62.55 | 102.23,63.5 R19.1 102.23,62.55 | R18.1 102.23,62.55
N$26
  Bottom 2.54: U$12.P$1 16.18,87.96 14.29,89.85 | 14.29,89.85 12.38,89.85 J9.2 | J9.1 17.14,90.49 16.51,89.85 14.29,89.85
N$27
  Bottom 0.813: U$30.P$1 66.55,80.46 66.67,80.33 66.04,80.33 66.04,76.52 | 66.04,76.52 U$26.P$1 | 65.41,76.52 66.04,76.52
  Bottom 3.81: U$20.P$1 49.31,68.04 58.42,76.84 65.41,76.52
N$28
  Bottom 0.61: P2.3 80.01,135.89 82.87,133.03 R17.1
  Bottom 0.813: R17.1 97.15,133.03
N$29
  Bottom 0.61: U1.2 91.12,125.73 87.63,122.24 R20.1 | 87.63,120.33 87.63,108.27 93.98,101.92 97.15,101.92 104.14,94.93 104.14,90.49 108.27,86.36 108.27,80.33 110.81,77.79 110.81,76.52 | 110.81,76.52 D7.A | 110.81,76.52 C6.1
  Bottom 0.813: 87.63,120.33 R20.1
N$30
  Bottom 0.61: IC3.9 110.49,31.75 111.12,32.39 111.12,36.51 110.49,37.15 110.17,37.15 109.86,37.46 102.55,37.46 98.11,41.91 98.11,80.65 95.57,83.18 95.57,93.66 93.35,95.89 93.35,100.01 85.73,107.63 85.73,118.43 82.23,121.92 79.38,121.92 77.15,124.14 77.15,125.41 77.47,125.73 | 77.47,125.73 | 77.47,125.73 P2.1 77.31,125.89 77.15,126.05 77.15,125.73 77.47,126.05 77.47,128.91 79.38,130.81 R20.2 87.31,130.49 89.54,128.27 U1.1
N$31
  Bottom 0.61: R14.2 103.19,19.68 103.19,26.99 102.23,27.94 94.93,27.94 93.03,26.03 93.03,25.08 93.35,24.76 T4.4 93.03,23.81 | 93.03,23.81 93.03,23.5 93.66,22.86 T4.1 93.03,23.18 93.03,23.81 | T5.2 85.41,23.18 86.36,24.13 92.71,24.13 93.03,23.81
N$32
  Bottom 0.61: IC3.14 107.32,18.73 104.77,21.27 104.77,32.39 106.68,34.29 D9.A
N$33
  Bottom 0.61: U1.9 112.39,115.57 111.12,114.62 111.12,112.08 112.39,110.81 113.03,110.81 | 113.03,110.81 122.24,110.81 124.14,112.71 | 124.14,112.71 124.14,116.2 R23.2 | 124.14,112.71 124.3,129.22 | R22.2 113.67,105.09 112.71,106.04 112.71,110.49 113.03,110.81
  Bottom 0.813: J2.10 J2.8 J2.6 J2.4 J2.2 | 127.16,132.72 C1.1 | C1.1 | 124.3,129.22 127.16,132.08 127.16,132.72 | 127.16,132.72 129.22,134.62 129.22,157 125.89,160.34 124.62,160.34 124.46,160.18 124.3,160.18 J2.10 | J2.10
N$34
  Bottom 0.61: R37.2 100.96,104.46 100.65,104.14 94.3,104.14 89.54,108.9 89.54,121.29 91.12,122.87 R17.2 R16.2 101.6,123.19 U1.3
N$35
  Top 0.61: J8.2 26.99,100.33 31.75,95.57 31.75,91.44 31.43,91.12 C23.2
  Bottom 0.61: C23.2 31.59,89.38 32.7,88.26 52.7,88.26 57.78,93.34 57.74,93.39 U$89.1
  Bottom 2.54: U$14.P$1 10.38,67.73 5.08,73.03 5.08,98.42 6.98,100.33 11.11,100.33 11.43,100.65 11.75,100.33 J8.1 12.06,100.65 12.38,100.33 J8.2
N$36  (via drill 0.61 pad 2.18)
  Top 0.61: v108.58,92.07 v91.44,92.07
  Bottom 0.61: U1.10 112.08,118.11 110.17,116.52 110.17,96.52 108.58,94.93 v108.58,92.07 | v91.44,92.07 91.44,82.23 94.3,79.06 94.3,66.67 93.23,65.29 R29.2
  Bottom 0.813: R29.2 91.43,62.87 R21.2
N$37
  Bottom 0.61: U$90.1 49.61,93.42 49.53,93.34 49.53,93.35 39.37,93.35
  Bottom 0.813: C24.2 39.37,93.35 36.83,95.89 23.81,95.89
  Bottom 2.54: U$11.P$1 20.26,57.73 23.81,61.28 23.81,95.89 23.81,103.51 16.83,110.49 | 16.83,110.49 J6.2 | 17.46,110.49 J6.1 16.83,110.49
N$38
  Top 0.813: U$31.P$1 66.63,66.95 66.04,66.99 66.04,70.17 66.63,70.21 U$28.P$1
  Top 3.81: U$31.P$1 59.79,66.46 55.25,62.23 55.25,32.39 39.37,16.51 J12.1
  Bottom 2.54: J12.2 J12.1
N$39
  Bottom 0.61: C18.2 8.1,123.67 8.26,123.51 9.98,125.23 U$35.1 26.81,125.23 26.72,125.15 | C19.1 25.48,142.48 26.67,141.29 | 26.72,125.15 U$32.1 26.72,141.34 26.67,141.29 | 26.72,125.15 26.67,125.1 | 26.67,141.29 26.67,134.3 27.3,133.67 U$76.1 35.24,155.57 35.56,155.89 U$74.1
N$41
  Bottom 0.61: U$79.1 65.41,133.67 65.41,140.97 65.41,140.98 65.41,141.28
  Bottom 0.813: U$34.1 65.27,141.42 65.41,141.28 U$57.1
N$45
  Top 2.54: 29.84,26.99 34.61,26.99 J11.1
  Top 3.81: 29.84,26.99 29.84,73.66 33.97,77.79 41.28,77.79 41.21,77.73 U$21.P$1
  Bottom 2.54: J11.2 J11.1
N$47
  Bottom 0.61: U1.13 112.08,125.73 111.12,126.68 111.12,132.08 R1.1 | 107.16,136.21 104.77,138.59 R31.2
  Bottom 0.813: R31.2 R25.2 101.12,141.92 C22.2 | R1.1 107.16,136.21
N$48
  Bottom 0.61: 105.73,108.59 105.73,112.08 | R41.2 R43.2 105.41,108.27 105.73,108.59 | 105.73,108.59 R46.1
  Bottom 0.813: 105.73,112.08 106.36,112.4 105.73,113.03 U1.7 106.68,113.03
N$50
  Bottom 0.813: 116.68,157.96 J2.3 116.05,157.32 R36.2
N$51
  Bottom 0.61: IC2.1 122.87,85.41 125.41,82.55 R27.1
N$52
  Bottom 0.61: C1.2 121.92,120.65 120.65,119.38 | R24.2 119.38,119.38 120.65,119.38 | U1.8 119.7,113.03 120.65,113.98 120.65,119.38
  Bottom 0.813: R15.1 R36.1 118.43,144.14 | 118.43,144.14 R38.1 R40.1 123.98,144.14 | 123.98,144.14 118.43,144.14 | 123.98,144.14 R42.1 | 118.43,144.14 R33.2 | C1.2 122.24,134.3 123.98,136.05 123.98,144.14
N$53
  Bottom 0.61: IC1.6 107.95,57.47 104.46,53.97 104.46,47.63 105.09,46.99 112.71,46.99 114.3,45.4 114.3,13.02 115.57,11.75 122.87,11.75 R4.1
N$54
  Bottom 0.61: R35.1 81.6,39.37 82.23,40 82.23,102.87 70.48,114.62 D5.A
N$56
  Bottom 0.61: R25.1 91.44,142.56 91.28,142.4 D11.K
N$57
  Bottom 0.61: R42.2 125.57,154.62
  Bottom 0.813: J2.9 123.98,157.64 125.57,156.05 125.57,154.62
N$58
  Bottom 0.61: 117.79,126.68 116.2,128.27 U1.14 113.98,134.3 108.11,140.18 108.11,160.02 110.81,162.72 126.21,162.72 140.02,148.91 143.51,148.91 145.1,147.32 145.1,18.41 129.54,2.86 93.98,2.86 91.44,5.4 R28.1
  Bottom 0.813: R26.1 117.79,126.68
N$59
  Bottom 0.813: R26.2 D14.A 128.27,122.87
N$60
  Bottom 0.61: 143.51,82.55 143.51,18.73 129.22,4.44 94.61,4.44 93.66,5.4 93.66,12.7 | R27.2 143.51,82.55 | 93.66,18.41 R28.2 | 93.66,18.41 R47.2 | 93.66,12.7 93.66,13.02 | 93.66,13.02 93.66,18.41 | 143.19,134.94 142.87,134.94 143.51,134.3 143.51,82.55 | 93.66,13.02 93.5,12.86 | T2.2 85.57,13.49 86.68,12.38 93.35,12.38 93.66,12.7 | 93.66,12.7 93.5,12.86 | 93.5,12.86
  Bottom 0.813: 143.19,134.94 142.87,135.26 R32.2
N$61
  Bottom 0.61: U$93.1 49.42,104.25 39.05,114.62 34.92,114.62 | 34.92,114.62 26.67,114.62 26.35,114.3 26.67,114.3 | 26.67,114.3 26.86,114.49 | C19.2 20.72,120.25 26.67,114.3 | U$77.1 35.24,114.93 34.92,114.62
N$62
  Bottom 0.61: IC3.13 110.49,21.59 110.17,21.27 108.9,21.27 106.68,23.5 106.68,30.8 109.86,33.97 109.86,35.24 108.58,36.2 100.96,36.2 | 93.66,82.23 93.66,93.66 86.36,100.96 86.36,104.78 83.5,107.63 D15.K | 96.52,79.37 96.52,40 R39.1
  Bottom 0.813: 96.52,79.37 93.66,82.23 | 100.96,36.2 R39.1
N$63
  Bottom 0.61: 80.49,118.59 78.26,118.59 73.98,122.87 73.98,135.57 76.83,138.43 81.92,138.43 84.45,135.89 D13.A 84.45,136.21 | C16.P 80.65,116.52 80.64,117.16 80.49,118.59 | D5.K 80.49,118.59
N$64
  Bottom 0.813: J2.5 119.22,157.64 R38.2 | J2.5
N$65
  Bottom 0.61: T4.2 95.57,25.72 96.2,26.35 100.01,26.35 R39.2
N$66
  Bottom 0.813: 121.6,157.48 | 121.6,157.48 J2.7 | R40.2 122.4,156.69 121.6,157.48
N$67
  Bottom 0.813: R15.2 112.87,156.69 J2.1
N$68
  Bottom 0.61: 99.38,115.57 U1.6 | R41.1 99.38,118.43 99.38,115.57 | D15.A C17.1 97.15,110.81 99.38,113.03 99.38,115.57
N$69
  Bottom 0.61: U1.5 106.05,118.11 105.73,118.43 R43.1 100.33,120.65 R45.2 91.12,118.43 91.12,109.22 93.66,106.68 R44.2 96.52,106.68
N$70
  Top 0.61: 136.21,86.04 128.27,93.66 128.27,113.35 130.49,115.57 130.49,117.79 131.13,118.43 134.3,118.43 J10.7
  Top 0.813: 136.21,86.04 136.21,73.98 140.97,69.21 D16.A
N$71
  Bottom 0.61: R46.2 115.89,108.27 123.19,108.27 130.17,115.25 130.17,121.92 132.08,123.82 J10.6
N$72
  Top 0.61: J10.9 148.59,108.59 150.18,107 150.18,72.39 146.37,68.58 146.37,27.94 139.38,20.96 139.38,13.02 129.86,3.49 D18.A
N$73
  Bottom 0.813: D18.K 79.37,3.49 79.22,3.65 79.06,3.49 R48.1
N$75
  Bottom 0.61: D2.A D8.A | 121.6,40.32 R7.2 | 121.6,40.32 120.65,41.59 | 127.64,40.32 R6.2 | 121.6,40.32 121.6,30.48 120.02,28.89 IC3.7
  Bottom 0.813: 120.65,41.59 D2.A | R7.2 127.64,40.32
N$76
  Bottom 0.61: IC1.14 118.11,65.09 116.84,63.82 116.84,46.99 | 116.84,46.99 116.84,35.56 118.11,34.29 D9.K | 116.84,46.99 121.29,46.99 123.19,45.08 R13.2
N$77
  Bottom 0.61: U$97.1 57.74,100.37 57.78,100.33 57.47,101.92 40,119.38 40,159.7 38.42,161.29 35.24,161.29 U$72.1 28.89,160.97 26.77,158.85 U$29.1 26.77,152.3 26.99,152.08 | C18.1 23.81,147.96 26.67,150.81 26.67,151.76 26.99,152.08 | 26.99,152.08 27.3,152.4
N$200
  Bottom 0.61: R3.2 107.95,8.25 99.7,16.51 | 99.7,18.73 99.7,16.51 | 99.7,18.73 R2.2 99.7,19.37 98.42,20.64 90.17,20.64 87.63,18.1 83.5,18.1 83.03,17.62 T2.4 83.03,15.08 83.66,14.45 T2.1 83.66,11.91 85.41,10.16 T1.2 | 99.7,16.51 100.01,16.51 99.7,16.83 99.7,18.73
OFF
  Bottom 0.813: J10.2 140.97,144.14 R32.1
ON
  Top 0.61: J10.1 145.73,149.23 151.77,143.19 151.77,70.48 D21.A 148.27,26.99 D17.A

## Text on the board
Top: ASPIRATION-A
Bottom: ASPIRATION-A
tNames: ON | ALIM 1 | OFF | AUTO | AIR | ARRET MOM | + | ALIM 2 | LED AIR | - | +12 | + | LED ASP | - | 0V | 400V TRI | +24 | 230 V MONO | RESEAU | FILTRE | EV | J5 | CAPT 2 | CONTACTEUR | CAPT 1 | MOTEUR | 400 v TRI | 230v MONO